# EAGLE board projet_micro_co (EAGLE 8.3.2)
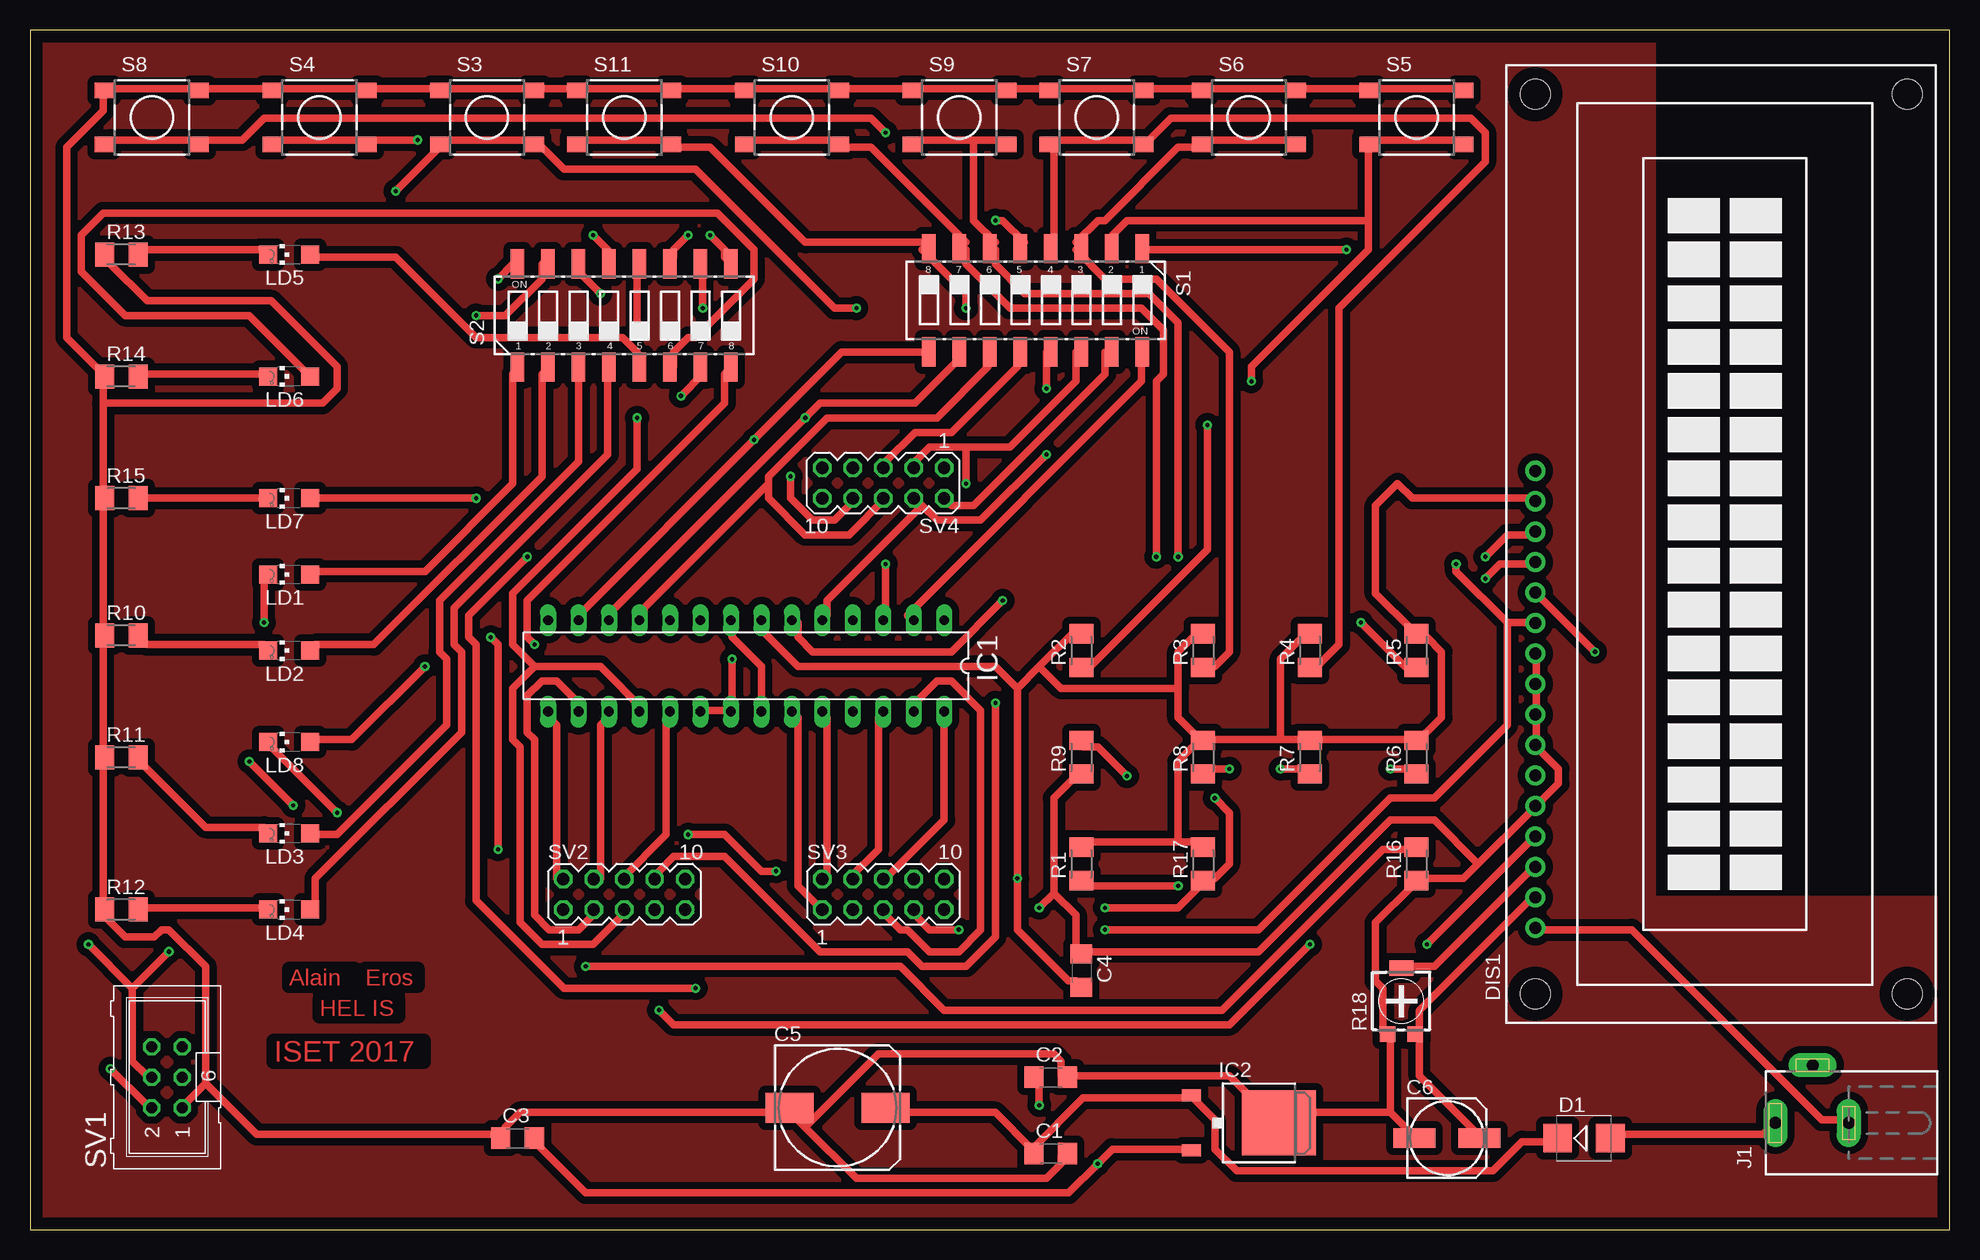
[diagram p0: board, top side]
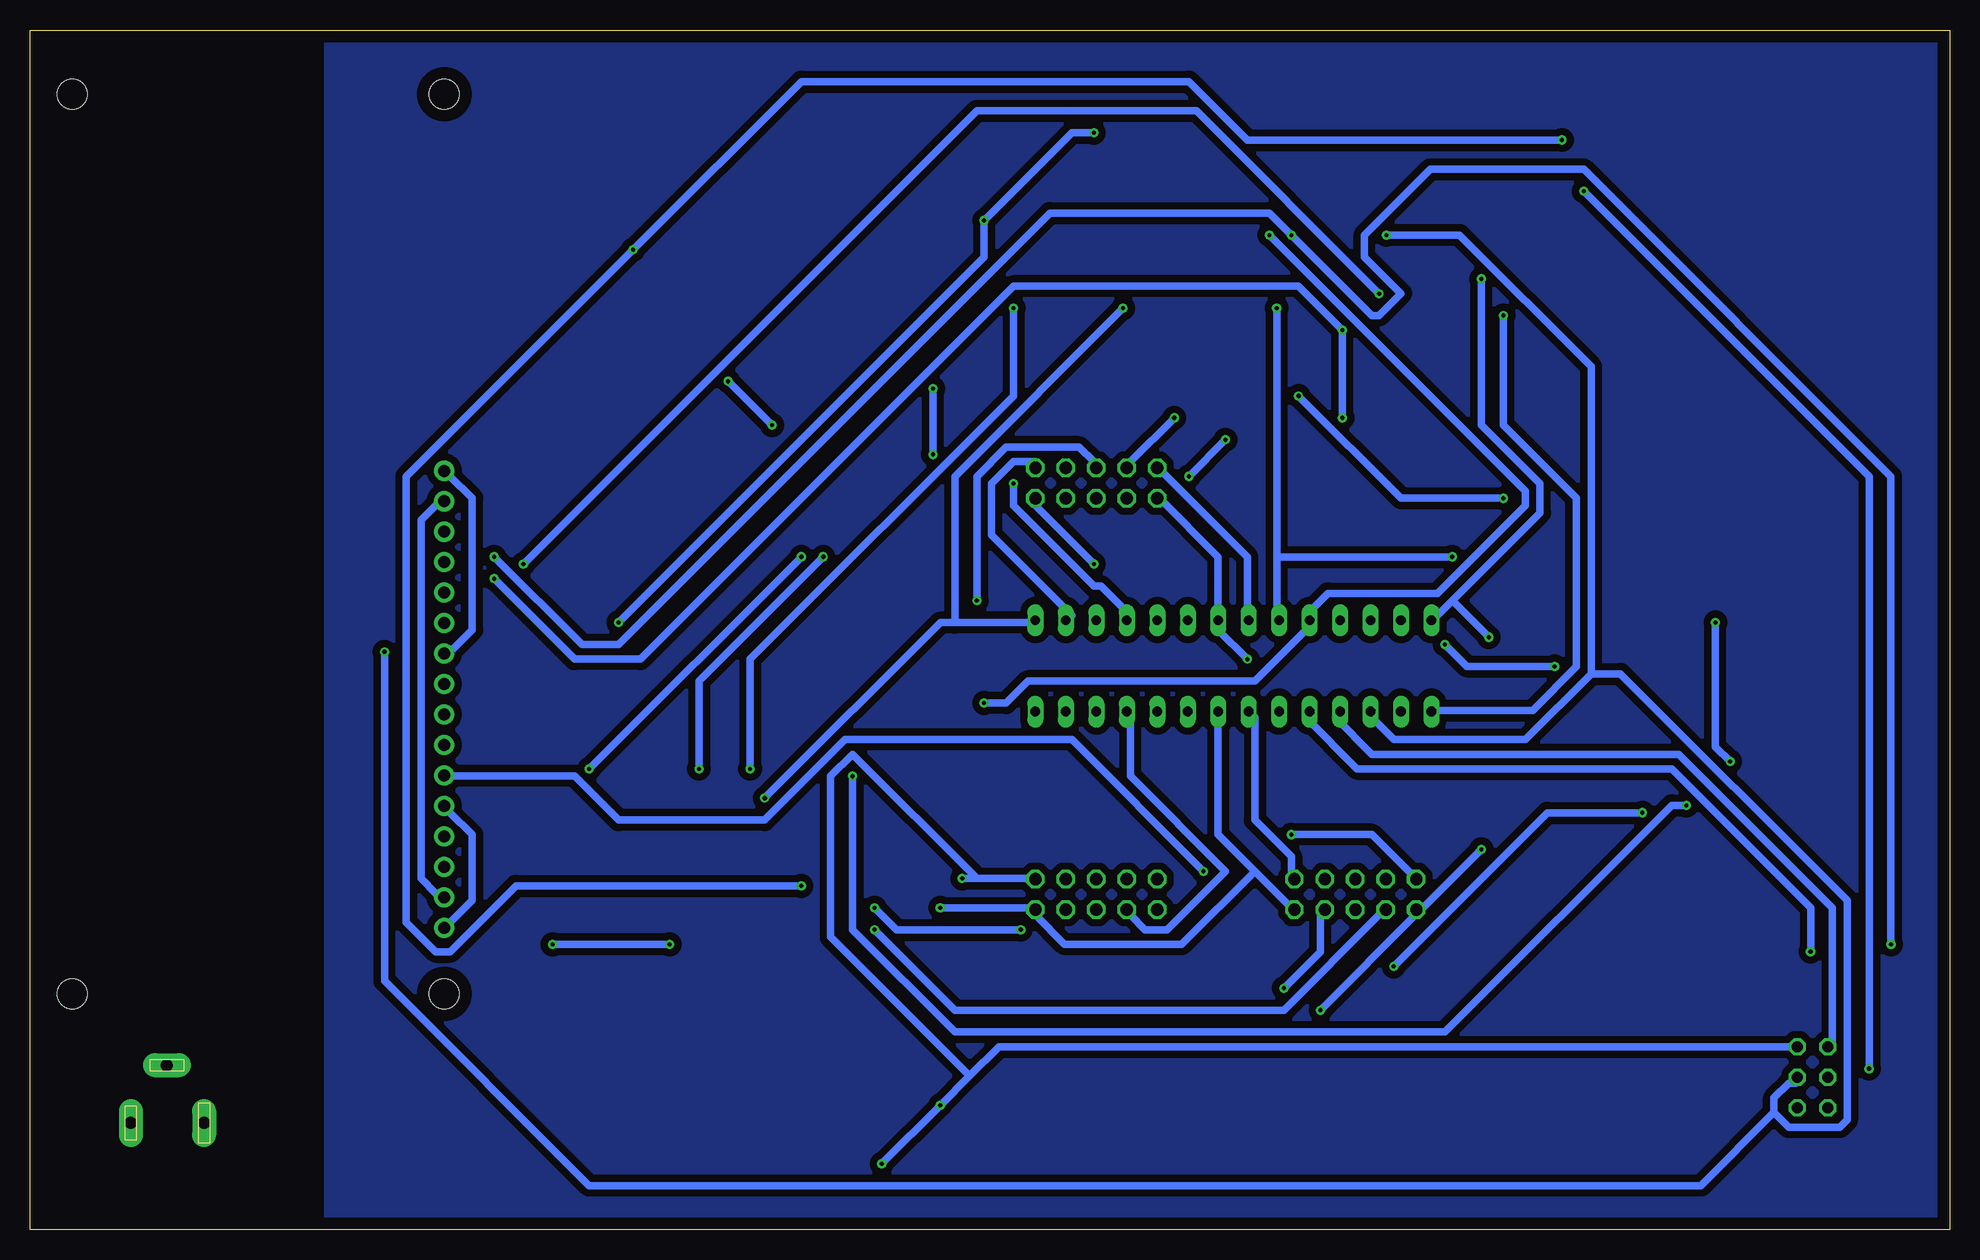
[diagram p1: board, bottom side, seen from below]

Size 160 x 100 mm. Coordinates in mm from the lower left corner, seen from the top.
Outline: 0,0 160,0 160,100 0,100 0,0
Copper layers (1*15*16): Top 0.035mm / dielectric 1.5mm / Route15 0.035mm / dielectric 0.2mm / Bottom 0.035mm
Design rules "default *": minimum track width 24mil, minimum drill 0.35mm, track to track 24mil, track to pad 24mil, pad to pad 24mil, via to via 24mil, smd to smd 24mil, copper to edge 40mil, drill to drill 6mil, minimum pad ring 10mil, minimum via ring 8mil, stop-mask expansion 4mil, vias tented up to drill 0mil, thermal gap 10mil

## Footprints (pad centres in the part's own frame; a part is rotated, then mirrored left to right if it is on the bottom)
C1206 = smd 1.6 x 1.8: 1 -1.4,0; 2 1.4,0
153CLV-1010 = smd 4 x 2.5: + 4,0; - -4,0
153CLV-0605 = smd 3.5 x 1.6: + 2.7,0; - -2.7,0
SMB = smd 2.4 x 2.4: A 2.2,0; C -2.2,0
TUXGR_16X2_R2 = drill 1 pad 1.676: 1 -32,15.5; 2 -29.46,15.5; 3 -26.92,15.5; 4 -24.38,15.5; 5 -21.84,15.5; 6 -19.3,15.5; 7 -16.76,15.5; 8 -14.22,15.5; 9 -11.68,15.5; 10 -9.14,15.5; 11 -6.6,15.5; 12 -4.06,15.5; 13 -1.52,15.5; 14 1.02,15.5; 15 3.56,15.5; 16 6.1,15.5 | hole 2.5: -37.5,-15.5; 37.5,-15.5; -37.5,15.5; 37.5,15.5
DIL28-3 = drill 0.813 long: 1 -16.51,-3.81; 2 -13.97,-3.81; 3 -11.43,-3.81; 4 -8.89,-3.81; 5 -6.35,-3.81; 6 -3.81,-3.81; 7 -1.27,-3.81; 8 1.27,-3.81; 9 3.81,-3.81; 10 6.35,-3.81; 11 8.89,-3.81; 12 11.43,-3.81; 13 13.97,-3.81; 14 16.51,-3.81; 15 16.51,3.81; 16 13.97,3.81; 17 11.43,3.81; 18 8.89,3.81; 19 6.35,3.81; 20 3.81,3.81; 21 1.27,3.81; 22 -1.27,3.81; 23 -3.81,3.81; 24 -6.35,3.81; 25 -8.89,3.81; 26 -11.43,3.81; 27 -13.97,3.81; 28 -16.51,3.81
TO252 = smd 1 x 1.6: 1 -2.28,-4.8; 2 2.28,-4.8 | smd 5.4 x 6.2: 3 0,2.5
DCJ0202 = drill 1 pad 2 long: 1 0,3.1; 2 4.8,0; 3 0,-3
CHIPLED_1206 = smd 1.5 x 1.5: A 0,-1.75; C 0,1.75
M1206 = smd 1.6 x 2: 1 -1.4,0; 2 1.4,0
RTRIM4G/J = smd 1.3 x 1.3: 1 -1.15,-2.75; 3 1.15,-2.75 | smd 2 x 1.3: 2 0,2.75
CTS-219-08 = smd 1.13 x 2.44: 1 -8.89,-4.3; 2 -6.35,-4.3; 3 -3.81,-4.3; 4 -1.27,-4.3; 5 1.27,-4.3; 6 3.81,-4.3; 7 6.35,-4.3; 8 8.89,-4.3; 9 8.89,4.3; 10 6.35,4.3; 11 3.81,4.3; 12 1.27,4.3; 13 -1.27,4.3; 14 -3.81,4.3; 15 -6.35,4.3; 16 -8.89,4.3
DTSM-6 = smd 1.55 x 1.3: 1 -3.975,2.25; 2 3.975,2.25; 3 -3.975,-2.25; 4 3.975,-2.25
ML6 = drill 0.914 octagon: 1 -2.54,-1.27; 2 -2.54,1.27; 3 0,-1.27; 4 0,1.27; 5 2.54,-1.27; 6 2.54,1.27
MA05-2 = drill 1.016 octagon: 1 -5.08,-1.27; 2 -5.08,1.27; 3 -2.54,-1.27; 4 -2.54,1.27; 5 0,-1.27; 6 0,1.27; 7 2.54,-1.27; 8 2.54,1.27; 9 5.08,-1.27; 10 5.08,1.27

## Placement (x,y rotation side)
C1  [C1206]  85.09,6.35 0 top
C2  [C1206]  85.09,12.7 0 top
C3  [C1206]  40.64,7.62 0 top
C4  [C1206]  87.63,21.59 270 top
C5  [153CLV-1010]  67.31,10.16 0 top
C6  [153CLV-0605]  118.11,7.62 0 top
D1  ES2D  [SMB]  129.54,7.62 0 top
DIS1  TUXGR_16X2_R2  [TUXGR_16X2_R2]  140.97,57.15 90 top
IC1  MEGA8-P  [DIL28-3]  59.69,46.99 180 top
IC2  7805DT  [TO252]  101.6,8.89 270 top
J1  DCJ0202  [DCJ0202]  148.59,8.89 90 top
LD1  [CHIPLED_1206]  21.59,54.61 90 top
LD2  [CHIPLED_1206]  21.59,48.26 90 top
LD3  [CHIPLED_1206]  21.59,33.02 90 top
LD4  [CHIPLED_1206]  21.59,26.67 90 top
LD5  [CHIPLED_1206]  21.59,81.28 90 top
LD6  [CHIPLED_1206]  21.59,71.12 90 top
LD7  [CHIPLED_1206]  21.59,60.96 90 top
LD8  [CHIPLED_1206]  21.59,40.64 90 top
R1  [M1206]  87.63,30.48 90 top
R2  [M1206]  87.63,48.26 90 top
R3  [M1206]  97.79,48.26 90 top
R4  [M1206]  106.68,48.26 90 top
R5  [M1206]  115.57,48.26 90 top
R6  [M1206]  115.57,39.37 90 top
R7  [M1206]  106.68,39.37 90 top
R8  [M1206]  97.79,39.37 90 top
R9  [M1206]  87.63,39.37 90 top
R10  [M1206]  7.62,49.53 0 top
R11  [M1206]  7.62,39.37 0 top
R12  [M1206]  7.62,26.67 0 top
R13  [M1206]  7.62,81.28 0 top
R14  [M1206]  7.62,71.12 0 top
R15  [M1206]  7.62,60.96 0 top
R16  [M1206]  115.57,30.48 90 top
R17  [M1206]  97.79,30.48 90 top
R18  [RTRIM4G/J]  114.3,19.05 0 top
S1  219-08  [CTS-219-08]  83.82,77.47 180 top
S2  219-08  [CTS-219-08]  49.53,76.2 0 top
S3  DTSM-6  [DTSM-6]  38.1,92.71 0 top
S4  DTSM-6  [DTSM-6]  24.13,92.71 0 top
S5  DTSM-6  [DTSM-6]  115.57,92.71 0 top
S6  DTSM-6  [DTSM-6]  101.6,92.71 0 top
S7  DTSM-6  [DTSM-6]  88.9,92.71 0 top
S8  DTSM-6  [DTSM-6]  10.16,92.71 0 top
S9  DTSM-6  [DTSM-6]  77.47,92.71 0 top
S10  DTSM-6  [DTSM-6]  63.5,92.71 0 top
S11  DTSM-6  [DTSM-6]  49.53,92.71 0 top
SV1  [ML6]  11.43,12.7 90 top
SV2  [MA05-2]  49.53,27.94 0 top
SV3  [MA05-2]  71.12,27.94 0 top
SV4  [MA05-2]  71.12,62.23 180 top

## Library data of the parts
C1-C6 R1-R18 = rcl
D1 = diode
DIS1 = display-lcd; OC_FARNELL: unknown; OC_NEWARK: unknown
IC1 = atmel; OC_FARNELL: unknown; OC_NEWARK: unknown
IC2 = linear
J1 = con-jack; OC_FARNELL: unknown; OC_NEWARK: unknown
LD1-LD8 = led
S1 S2 = switch-dil; OC_FARNELL: unknown; OC_NEWARK: unknown
S3-S11 = switch-tact
SV1 = con-ml; OC_FARNELL: unknown; OC_NEWARK: unknown
SV2-SV4 = con-lstb; OC_FARNELL: unknown; OC_NEWARK: unknown

## Nets
BP0: R1.1 S1.1 S4.3 S4.4
BP1: R2.1 S1.2 S5.3 S5.4
BP2: R3.1 S1.3 S6.3 S6.4
BP3: R4.1 S1.4 S7.3 S7.4
BP4: R5.1 S1.5 S8.3 S8.4
BP5: R6.1 S1.6 S9.3 S9.4
BP6: R7.1 S1.7 S10.3 S10.4
BP7: R8.1 S1.8 S11.3 S11.4
GND: C1.2 C2.2 C3.1 C4.1 C5.- C6.- DIS1.1 DIS1.5 DIS1.7 DIS1.8 DIS1.9 DIS1.10 DIS1.16 IC1.8 IC1.22 IC2.3 J1.3 R9.1 R10.1 R11.1 R12.1 R13.1 R14.1 R15.1 R16.1 R18.1 S3.1 S3.2 S4.1 S4.2 S5.1 S5.2 S6.1 S6.2 S7.1 S7.2 S8.1 S8.2 S9.1 S9.2 S10.1 S10.2 S11.1 S11.2 SV1.1 SV2.9 SV3.9 SV4.9
LED0: LD1.A S2.1
LED1: LD2.A S2.2
LED2: LD3.A S2.3
LED3: LD4.A S2.4
LED4: LD5.A S2.5
LED5: LD6.A S2.6
LED6: LD7.A S2.7
LED7: LD8.A S2.8
N$1: DIS1.3 R18.2
N$2: D1.A J1.1
N$3: C1.1 C5.+ D1.C IC2.1
N$4: LD1.C R9.2
N$5: LD2.C R10.2
N$6: LD3.C R11.2
N$7: LD4.C R12.2
N$8: LD5.C R13.2
N$9: LD6.C R14.2
N$10: LD7.C R15.2
N$11: LD8.C R16.2
PB0: DIS1.4 IC1.14 S2.16 SV2.1
PB1: DIS1.6 IC1.15 S2.15 SV2.2
PB2: DIS1.11 IC1.16 S2.14 SV2.3
PB3: DIS1.12 IC1.17 S2.13 SV1.3 SV2.4
PB4: DIS1.13 IC1.18 S2.12 SV1.6 SV2.5
PB5: DIS1.14 IC1.19 S2.11 SV1.4 SV2.6
PB6: IC1.9 S2.10 SV2.7
PB7: IC1.10 S2.9 SV2.8
PC0: IC1.23 SV3.1
PC1: IC1.24 SV3.2
PC2: IC1.25 SV3.3
PC3: IC1.26 SV3.4
PC4: IC1.27 SV3.5
PC5: IC1.28 SV3.6
PC6: IC1.1 R17.1 S3.3 S3.4 SV1.2 SV3.7
PD0: IC1.2 S1.16 SV4.1
PD1: IC1.3 S1.15 SV4.2
PD2: IC1.4 S1.14 SV4.3
PD3: IC1.5 S1.13 SV4.4
PD4: IC1.6 S1.12 SV4.5
PD5: IC1.11 S1.11 SV4.6
PD6: IC1.12 S1.10 SV4.7
PD7: IC1.13 S1.9 SV4.8
VCC: C2.1 C3.2 C4.2 C6.+ DIS1.2 DIS1.15 IC1.7 IC1.20 IC1.21 IC2.2 R1.2 R2.2 R3.2 R4.2 R5.2 R6.2 R7.2 R8.2 R17.2 R18.3 SV1.5 SV2.10 SV3.10 SV4.10

## Tracks (layer width: path | path; a pad name or v marks a point on that pad's centre or on a via)
BP0  (via drill 0.35)
  Top 0.61: S4.3 20.73,90.83 28.04,90.83 S4.4 28.65,90.83 v32.31,90.83 | v95.71,28.65 87.78,28.65 R1.1 | v109.73,81.69 93.27,81.69 S1.1
  Bottom 0.61: v95.71,28.65 119.48,28.65 124.97,23.16 126.19,23.16 128.63,25.6 128.63,62.79 v109.73,81.69 95.71,95.71 63.4,95.71 58.52,90.83 v32.31,90.83
BP1  (via drill 0.35)
  Top 0.61: S5.4 119.48,90.83 112.17,90.83 S5.3 111.56,90.22 111.56,84.12 | v98.15,67.06 98.15,56.69 88.39,46.94 87.78,46.94 R2.1 | v101.8,70.71 101.8,71.93 111.56,81.69 111.56,84.12 | 111.56,84.12 91.44,84.12 90.22,82.91 90.22,82.3 S1.2
  Bottom 0.61: v101.8,70.71 v98.15,67.06
BP2
  Top 0.61: S6.4 105.46,90.83 98.15,90.83 S6.3 97.54,90.22 95.71,90.22 89.61,84.12 89,84.12 87.17,82.3 S1.3 87.17,81.69 89.61,79.25 93.88,79.25 99.97,73.15 99.97,48.16 98.75,46.94 98.15,46.94 R3.1
BP3
  Top 0.61: R4.1 106.68,46.94 107.29,46.94 109.12,48.77 109.12,76.81 121.31,89 121.31,91.44 120.09,92.66 95.1,92.66 93.27,90.83 S7.4 92.66,90.83 85.34,90.83 S7.3 85.34,90.22 85.34,82.3 S1.4
BP4  (via drill 0.35)
  Top 0.61: S8.3 6.71,90.83 14.02,90.83 S8.4 14.63,90.83 17.68,90.83 19.51,92.66 70.1,92.66 v71.32,91.44 | v110.95,50.6 114.61,46.94 115.21,46.94 R5.1 | v80.47,84.12 81.08,84.12 82.91,82.3 S1.5
  Bottom 0.61: v110.95,50.6 80.47,81.08 v80.47,84.12 73.15,91.44 v71.32,91.44
BP5  (via drill 0.35)
  Top 0.61: 78.64,90.83 81.08,90.83 S9.4 | 78.64,90.83 73.76,90.83 S9.3 | v113.39,38.41 115.21,38.41 R6.1 | v95.71,56.08 95.71,75.59 93.27,78.03 82.91,78.03 80.47,80.47 80.47,81.69 S1.6 80.47,82.3 78.64,84.12 78.64,90.83
  Bottom 0.61: v95.71,56.08 v113.39,38.41
BP6  (via drill 0.35)
  Top 0.61: S10.3 59.74,90.83 67.06,90.83 S10.4 67.67,90.22 70.1,90.22 78.03,82.3 S1.7 78.03,81.69 78.03,80.47 81.69,76.81 92.66,76.81 94.49,74.98 94.49,71.32 93.88,70.71 v93.88,56.08 | v104.24,38.41 106.68,38.41 R7.1
  Bottom 0.61: v104.24,38.41 104.24,45.72 v93.88,56.08
BP7  (via drill 0.35)
  Top 0.61: S11.3 45.72,90.83 53.03,90.83 S11.4 53.65,90.22 56.69,90.22 64.62,82.3 74.37,82.3 S1.8 74.37,81.69 78.03,78.03 v78.03,76.81 | v99.97,38.41 98.15,38.41 R8.1
  Bottom 0.61: v99.97,38.41 99.97,47.55 78.03,69.49 v78.03,76.81
GND  (via drill 0.35)
  Top 0.61: IC1.22 60.96,46.94 58.52,49.38 58.52,50.6 IC1.8 | 113.39,9.75 113.39,15.85 R18.1 112.78,16.46 112.78,20.12 112.17,20.73 112.17,25.6 115.21,28.65 R16.1 115.82,29.26 119.48,29.26 120.7,30.48 | 113.39,9.75 115.21,7.92 C6.- | 113.39,9.75 104.85,9.75 104.24,9.14 IC2.3 103.63,9.14 99.97,12.8 86.56,12.8 C2.2 85.95,12.8 85.95,14.02 85.34,14.63 70.71,14.63 64.62,8.53 | DIS1.10 125.58,47.55 125.58,45.72 DIS1.9 125.58,45.11 125.58,43.28 DIS1.8 125.58,42.67 125.58,40.84 DIS1.7 125.58,40.23 127.41,38.41 127.41,37.19 125.58,35.36 DIS1.5 124.97,34.75 120.7,30.48 | 85.34,28.04 87.17,26.21 87.17,23.16 C4.1 87.78,23.16 102.41,23.16 113.39,34.14 117.04,34.14 120.7,30.48 | 85.34,28.04 85.34,35.97 87.17,37.8 R9.1 | J1.3 151.18,9.14 149.35,9.14 133.5,24.99 125.58,24.99 DIS1.1 | 85.34,28.04 v84.12,26.82 | S5.2 119.48,95.1 112.17,95.1 S5.1 111.56,95.1 106.07,95.1 S6.2 105.46,95.1 98.15,95.1 S6.1 97.54,95.1 93.27,95.1 S7.2 92.66,95.1 85.34,95.1 S7.1 84.73,95.1 81.69,95.1 S9.2 81.08,95.1 73.76,95.1 S9.1 73.15,95.1 67.67,95.1 S10.2 67.06,95.1 59.74,95.1 S10.1 59.13,95.1 53.65,95.1 S11.2 53.03,95.1 45.72,95.1 S11.1 45.11,95.1 42.67,95.1 S3.2 42.06,95.1 34.14,95.1 S3.1 33.53,95.1 28.65,95.1 S4.2 28.04,95.1 20.73,95.1 S4.1 20.12,95.1 14.63,95.1 S8.2 14.02,95.1 6.71,95.1 S8.1 6.1,94.49 6.1,93.27 3.05,90.22 3.05,74.37 6.1,71.32 R14.1 6.1,70.71 6.1,68.89 | 64.62,8.53 63.4,9.75 C5.- 62.79,9.75 40.84,9.75 39.62,8.53 39.62,7.92 C3.1 39.01,7.92 18.9,7.92 14.63,12.19 | 64.62,8.53 68.89,4.27 84.73,4.27 85.95,5.49 85.95,6.1 C1.2 | 6.1,68.89 6.1,60.96 | 6.1,68.89 24.38,68.89 25.6,70.1 25.6,71.93 20.12,77.42 9.75,77.42 6.71,80.47 6.71,81.08 R13.1
  Top 0.61: 14.63,12.19 12.8,10.36 SV1.1 | 14.63,12.19 14.63,21.95 11.58,24.99 10.97,24.99 10.36,24.38 7.92,24.38 6.1,26.21 R12.1 6.1,26.82 6.1,39.01 R11.1 6.1,39.62 6.1,49.38 R10.1 6.1,49.99 6.1,60.96 | 6.1,60.96 R15.1
  Bottom 0.61: 57.91,29.87 60.96,32.92 IC1.22 | 57.91,29.87 54.86,26.82 SV2.9 | 57.91,29.87 64.01,23.77 73.76,23.77 76.2,26.21 SV3.9 76.2,26.82 v84.12,26.82 | SV4.9 65.84,63.4 58.52,56.08 58.52,51.21 IC1.8 | DIS1.16 124.97,62.79 123.14,60.96 123.14,49.99 124.97,48.16 DIS1.10 | DIS1.1 124.97,25.6 123.14,27.43 123.14,32.92 124.97,34.75 DIS1.5
LED0
  Top 0.61: LD1.A 23.77,54.86 32.92,54.86 40.23,62.18 40.23,71.32 S2.1
LED1
  Top 0.61: LD2.A 23.77,48.77 28.65,48.77 42.67,62.79 42.67,71.32 S2.2
LED2
  Top 0.61: S2.3 45.72,64.01 34.14,52.43 34.14,48.16 34.75,47.55 34.75,42.06 25.6,32.92 23.77,32.92 LD3.A
LED3
  Top 0.61: LD4.A 23.77,26.82 23.77,29.26 35.97,41.45 35.97,48.16 35.36,48.77 35.36,51.82 48.16,64.62 48.16,71.32 S2.4
LED4
  Top 0.61: LD5.A 23.77,81.08 30.48,81.08 37.19,74.37 49.38,74.37 50.6,73.15 50.6,71.93 S2.5
LED5
  Top 0.61: LD6.A 23.16,71.32 18.29,76.2 7.92,76.2 4.27,79.86 4.27,82.91 6.1,84.73 57.3,84.73 60.35,81.69 60.35,79.25 55.47,74.37 54.86,74.37 53.65,73.15 53.65,71.93 S2.6
LED6  (via drill 0.35)
  Top 0.61: v37.19,60.96 LD7.A | v54.25,69.49 56.08,71.32 S2.7
  Bottom 0.61: v37.19,60.96 45.72,60.96 v54.25,69.49
LED7  (via drill 0.35)
  Top 0.61: v32.92,46.94 26.82,40.84 23.77,40.84 LD8.A | v42.06,48.77 41.45,49.38 41.45,52.43 57.91,68.89 57.91,71.32 S2.8
  Bottom 0.61: v32.92,46.94 40.23,46.94 v42.06,48.77
N$1
  Top 0.61: R18.2 114.61,21.95 117.04,21.95 124.97,29.87 DIS1.3
N$2
  Top 0.61: D1.A 132.28,7.92 144.47,7.92 145.09,8.53 J1.1
N$3
  Top 0.61: 83.52,6.71 87.78,10.97 96.32,10.97 IC2.1 96.93,10.97 98.75,9.14 98.75,6.71 100.58,4.88 121.92,4.88 124.36,7.32 126.8,7.32 D1.C | 83.52,6.71 80.47,9.75 71.32,9.75 C5.+ | 83.52,6.71 C1.1
N$4  (via drill 0.35)
  Top 0.61: v19.51,50.6 19.51,54.25 LD1.C | v21.95,35.36 v18.29,39.01 | v91.44,37.8 89,40.23 87.78,40.23 R9.2
  Bottom 0.61: v19.51,50.6 19.51,40.23 v18.29,39.01 | v21.95,35.36 23.16,35.36 42.06,16.46 82.91,16.46 91.44,24.99 v91.44,37.8
N$5
  Top 0.61: LD2.C 19.51,48.77 9.75,48.77 9.14,49.38 R10.2
N$6
  Top 0.61: LD3.C 19.51,33.53 14.63,33.53 9.14,39.01 R11.2
N$7
  Top 0.61: LD4.C 19.51,26.82 9.14,26.82 R12.2
N$8
  Top 0.61: LD5.C 19.51,81.69 9.14,81.69 R13.2
N$9
  Top 0.61: LD6.C 19.51,71.32 9.14,71.32 R14.2
N$10
  Top 0.61: R15.2 LD7.C
N$11  (via drill 0.35)
  Top 0.61: v25.6,34.75 20.12,40.23 LD8.C | v46.33,21.95 72.54,21.95 76.2,18.29 99.36,18.29 112.78,31.7 115.21,31.7 R16.2
  Bottom 0.61: v25.6,34.75 33.53,34.75 v46.33,21.95
N$12
  pour Top: 1.02,99.36 135.33,99.36 135.33,27.64 159.51,27.64 159.51,0.61 1.02,0.61 1.02,0.81 0.81,0.81 0.81,99.36
N$13
  pour Bottom: 0.81,99.36 135.33,99.36 135.33,0.61 0.81,0.61
PB0  (via drill 0.35)
  Top 0.61: v39.01,79.25 40.23,80.47 S2.16 | v39.01,31.7 39.01,48.77 v38.41,49.38 | v116.43,23.77 124.97,32.31 DIS1.4 | v106.68,23.77 99.97,17.07 53.65,17.07 v52.43,18.29
  Bottom 0.61: v39.01,79.25 39.01,67.06 34.14,62.18 34.14,59.74 41.45,52.43 | 41.45,52.43 42.67,51.21 IC1.14 | v39.01,31.7 43.89,26.82 SV2.1 44.5,26.21 v52.43,18.29 | 41.45,52.43 v38.41,49.38 | v106.68,23.77 v116.43,23.77
PB1  (via drill 0.35)
  Top 0.61: v37.19,76.2 39.62,76.2 42.67,79.25 42.67,80.47 S2.15 | SV2.2 43.89,29.26 43.89,42.06 43.28,42.67 IC1.15 | v62.18,29.87 60.96,29.87 57.91,32.92 v54.86,32.92
  Bottom 0.61: v37.19,76.2 37.19,67.06 31.09,60.96 31.09,46.94 34.75,43.28 42.67,43.28 IC1.15 | v62.18,29.87 73.15,40.84 92.05,40.84 98.75,34.14 110.95,34.14 114.61,37.8 124.97,37.8 DIS1.6 | v54.86,32.92 48.16,32.92 SV2.2
PB2  (via drill 0.35)
  Top 0.61: IC1.16 45.72,43.89 43.89,45.72 42.67,45.72 41.45,44.5 41.45,41.45 42.06,40.84 42.06,26.21 43.28,24.99 45.72,24.99 46.94,26.21 SV2.3 | S2.14 45.72,79.86 v47.55,78.03 | v118.87,55.47 118.87,54.86 123.14,50.6 | 123.14,50.6 124.97,50.6 DIS1.11 | v89.61,24.99 102.41,24.99 113.39,35.97 117.04,35.97 123.14,42.06 123.14,50.6
  Bottom 0.61: v47.55,78.03 62.79,93.27 81.08,93.27 v118.87,55.47 | v89.61,24.99 82.91,18.29 55.47,18.29 47.55,26.21 SV2.3
PB3  (via drill 0.35)
  Top 0.61: v46.94,82.91 48.16,81.69 48.16,81.08 S2.13 | SV2.4 47.55,29.26 47.55,42.06 48.16,42.67 IC1.17 | v130.45,48.16 125.58,53.03 DIS1.12
  Bottom 0.61: v46.94,82.91 40.84,82.91 29.87,71.93 29.87,46.33 | 29.87,46.33 35.36,40.84 46.33,40.84 48.16,42.67 IC1.17 | 14.63,9.75 14.63,10.97 13.41,12.19 12.8,12.19 SV1.3 | 14.63,9.75 13.41,8.53 9.14,8.53 8.53,9.14 8.53,27.43 27.43,46.33 29.87,46.33 | v130.45,48.16 130.45,20.73 113.39,3.66 20.73,3.66 14.63,9.75
PB4  (via drill 0.35)
  Top 0.61: v50.6,74.98 50.6,80.47 S2.12 | v50.6,67.67 50.6,63.4 40.23,53.03 40.23,48.77 42.06,46.94 | 42.06,46.94 47.55,46.94 51.21,43.28 IC1.18 | 42.06,46.94 40.23,45.11 40.23,40.84 40.84,40.23 40.84,25.6 42.67,23.77 46.94,23.77 49.38,26.21 SV2.5 | v121.31,54.25 122.53,55.47 124.97,55.47 DIS1.13
  Bottom 0.61: v50.6,67.67 v50.6,74.98 54.25,78.64 78.03,78.64 109.12,47.55 114.61,47.55 v121.31,54.25 | SV1.6 9.75,15.24 9.75,26.82 22.55,39.62 48.16,39.62 51.21,42.67 IC1.18
PB5  (via drill 0.35)
  Top 0.61: IC1.19 53.03,42.67 53.03,32.92 49.38,29.26 SV2.6 | 8.53,20.12 8.53,14.02 9.75,12.8 SV1.4 | v11.58,23.16 8.53,20.12 | v54.86,82.91 53.65,81.69 53.65,81.08 S2.11 | v121.31,56.08 123.14,57.91 124.97,57.91 DIS1.14 | v4.88,23.77 8.53,20.12
  Bottom 0.61: v11.58,23.16 11.58,26.82 23.16,38.41 49.38,38.41 53.65,42.67 IC1.19 | v121.31,56.08 114,48.77 110.95,48.77 74.98,84.73 56.69,84.73 v54.86,82.91 48.16,76.2 47.55,76.2 45.72,78.03 48.77,81.08 48.77,82.91 43.28,88.39 30.48,88.39 4.88,62.79 v4.88,23.77
PB6  (via drill 0.35)
  Top 0.61: v56.08,76.81 56.08,80.47 S2.10 | v55.47,20.12 44.5,20.12 37.19,27.43 37.19,48.77 36.58,49.38 36.58,51.21 v41.45,56.08
  Bottom 0.61: 56.08,56.08 56.08,51.21 IC1.9 | 56.08,56.08 v56.08,76.81 | v55.47,20.12 52.43,23.16 52.43,26.21 SV2.7 | 56.08,56.08 v41.45,56.08
PB7  (via drill 0.35)
  Top 0.61: v56.69,82.91 57.91,81.69 57.91,81.08 S2.9 | v80.47,43.89 80.47,24.38 78.03,21.95 74.37,21.95 73.15,23.16 65.84,23.16 57.91,31.09 53.65,31.09 52.43,29.87 52.43,29.26 SV2.8
  Bottom 0.61: v56.69,82.91 35.36,61.57 35.36,60.35 42.67,53.03 51.82,53.03 53.65,51.21 IC1.10 53.03,50.6 57.91,45.72 76.81,45.72 78.64,43.89 v80.47,43.89
PC0
  Top 0.61: IC1.23 64.01,42.67 64.01,28.65 65.84,26.82 SV3.1
PC1
  Top 0.61: IC1.24 66.45,42.67 66.45,29.26 SV3.2
PC2
  Bottom 0.61: IC1.25 68.28,42.67 68.28,37.8 60.35,29.87 65.23,24.99 67.06,24.99 68.28,26.21 SV3.3
PC3
  Top 0.61: IC1.26 70.71,42.67 70.71,31.7 68.28,29.26 SV3.4
PC4
  Top 0.61: IC1.27 73.76,43.28 73.76,43.89 75.59,45.72 76.81,45.72 79.25,43.28 79.25,24.99 77.42,23.16 74.98,23.16 73.15,24.99 72.54,24.99 71.32,26.21 SV3.5
PC5
  Top 0.61: IC1.28 76.2,34.14 71.32,29.26 SV3.6
PC6  (via drill 0.35)
  Top 0.61: v98.75,35.97 99.97,34.75 99.97,30.48 98.75,29.26 98.15,29.26 R17.1 97.54,28.65 95.71,26.82 v89.61,26.82 | v77.42,24.99 74.98,24.99 73.76,26.21 SV3.7 | v6.71,13.41 9.75,10.36 SV1.2 | v30.48,86.56 34.14,90.22 S3.3 34.14,90.83 42.06,90.83 S3.4 42.67,90.22 44.5,88.39 55.47,88.39 67.06,76.81 v68.89,76.81
  Bottom 0.61: v98.75,35.97 84.12,50.6 82.91,50.6 | 82.91,50.6 76.2,50.6 IC1.1 | v77.42,24.99 87.78,24.99 v89.61,26.82 | v6.71,13.41 6.71,62.79 v30.48,86.56 | 82.91,50.6 82.91,62.79 v68.89,76.81
PD0
  Top 0.61: S1.16 92.66,73.15 92.66,70.71 73.15,51.21 IC1.2
  Bottom 0.61: SV4.1 76.2,64.01 78.03,64.01 79.86,62.18 79.86,57.91 73.15,51.21 IC1.2
PD1  (via drill 0.35)
  Top 0.61: SV4.2 76.81,60.35 78.64,60.35 89.61,71.32 89.61,73.15 S1.15 | v71.32,55.47 71.32,51.21 IC1.3
  Bottom 0.61: v71.32,55.47 76.2,60.35 SV4.2
PD2  (via drill 0.35)
  Top 0.61: 78.03,65.23 74.98,65.23 73.76,64.01 SV4.3 | 78.03,65.23 81.69,65.23 87.17,70.71 87.17,73.15 S1.14 | 78.03,65.23 v78.03,62.18
  Bottom 0.61: v78.03,62.18 78.03,60.35 71.32,53.65 70.71,53.65 68.89,51.82 68.89,51.21 IC1.4
PD3  (via drill 0.35)
  Top 0.61: v84.73,70.1 84.73,73.15 S1.13 | v84.73,64.62 79.25,59.13 75.59,59.13 74.37,60.35 | 74.37,60.35 73.76,60.96 SV4.4 | 74.37,60.35 66.45,52.43 66.45,51.21 IC1.5
  Bottom 0.61: v84.73,64.62 v84.73,70.1
PD4  (via drill 0.35)
  Top 0.61: S1.12 82.3,73.15 82.3,71.93 76.81,66.45 73.76,66.45 71.32,64.01 SV4.5 | v81.08,52.43 76.81,48.16 65.23,48.16 64.01,49.38 64.01,50.6 IC1.6
  Bottom 0.61: v81.08,52.43 81.08,62.79 78.64,65.23 72.54,65.23 71.32,64.01 SV4.5
PD5
  Top 0.61: 61.57,62.18 61.57,60.96 64.62,57.91 68.28,57.91 71.32,60.96 SV4.6 | 61.57,62.18 61.57,62.79 66.45,67.67 75.59,67.67 79.86,71.93 79.86,73.15 S1.11 | 61.57,62.18 51.21,51.82 51.21,51.21 IC1.11
PD6  (via drill 0.35)
  Top 0.61: S1.10 77.42,73.15 77.42,72.54 73.76,68.89 65.84,68.89 v64.62,67.67 48.16,51.21 IC1.12
  Bottom 0.61: v64.62,67.67 68.28,64.01 SV4.7
PD7  (via drill 0.35)
  Top 0.61: S1.9 74.37,73.15 67.67,73.15 v60.35,65.84 45.72,51.21 IC1.13 | v63.4,62.79 63.4,60.96 65.23,59.13 67.06,59.13 68.28,60.35 68.28,60.96 SV4.8
  Bottom 0.61: v60.35,65.84 v63.4,62.79
VCC  (via drill 0.35)
  Top 0.61: IC2.2 96.32,6.71 90.22,6.71 v89,5.49 86.56,3.05 46.33,3.05 42.06,7.32 C3.2 | v84.12,10.36 84.12,12.19 C2.1 | IC1.20 56.08,43.28 57.91,43.28 IC1.21 58.52,43.28 v58.52,47.55 | 82.3,45.11 v82.3,29.26 82.3,24.99 86.56,20.73 87.17,20.73 C4.2 | 84.12,46.94 87.17,49.99 R2.2 | 84.12,46.94 82.3,45.11 | IC1.7 60.96,49.99 64.01,46.94 80.47,46.94 82.3,45.11 | C6.+ 120.7,7.92 115.82,12.8 115.82,15.85 R18.3 115.82,16.46 115.82,18.29 124.97,27.43 DIS1.2 | 95.71,32.31 97.54,32.31 R17.2 | 95.71,32.31 87.78,32.31 R1.2 | 106.68,40.84 104.24,40.84 | 104.24,40.84 98.15,40.84 R8.2 97.54,40.84 | 106.68,40.84 115.21,40.84 R6.2 115.82,40.84 117.65,42.67 117.65,48.16 116.43,49.38 115.82,49.38 R5.2 115.21,49.99 112.17,53.03 112.17,60.35 114,62.18 115.21,60.96 124.97,60.96 DIS1.15 | 106.68,40.84 R7.2 | 95.71,45.11 95.71,42.67 97.54,40.84 | 95.71,45.11 95.71,48.16 96.93,49.38 97.54,49.38 R3.2 | 104.24,40.84 104.24,47.55 106.07,49.38 106.68,49.38 R4.2 | 95.71,32.31 95.71,39.01 97.54,40.84 | 84.12,46.94 85.95,45.11 95.71,45.11
  Bottom 0.61: v89,5.49 v84.12,10.36 81.69,12.8 | SV1.5 79.25,15.24 81.69,12.8 | SV2.10 54.86,29.26 54.86,31.09 57.91,34.14 57.91,42.67 IC1.21 | SV4.10 65.84,60.96 60.96,56.08 IC1.7 60.96,49.99 v58.52,47.55 | v82.3,29.26 81.08,29.26 | 81.08,29.26 76.2,29.26 SV3.10 | DIS1.2 125.58,28.04 126.19,28.04 127.41,29.26 127.41,59.13 125.58,60.96 DIS1.15 | 81.69,12.8 93.27,24.38 93.27,37.8 91.44,39.62 81.08,29.26

## Text on the board
Top: Alain | Eros | HEL IS | ISET 2017